# Altium PCB LED DRIVER BOARD-PCB.PcbDoc
Units mil, origin at the board's own origin, x right, y up, seen from the top; angles counter-clockwise.
Board outline 2595.31 x 1299.21 mil, 2 copper layers (Top, Bottom), stack 12.7 mil thick; 22 components, 7 nets, 43 pads, 9 vias.
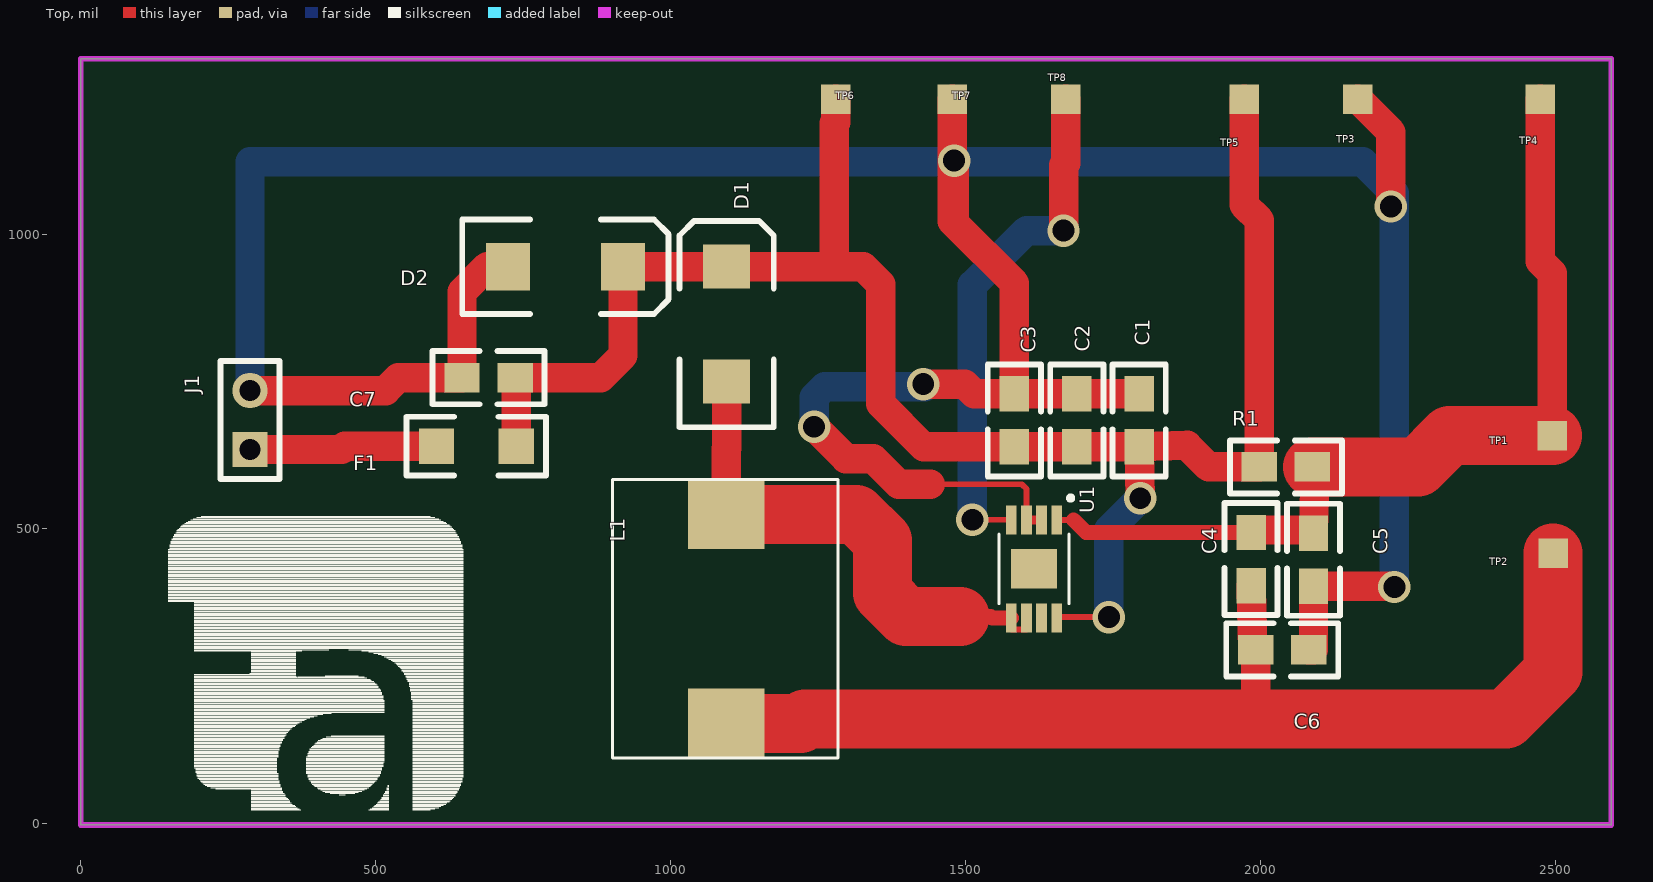
[diagram p0: Top view]
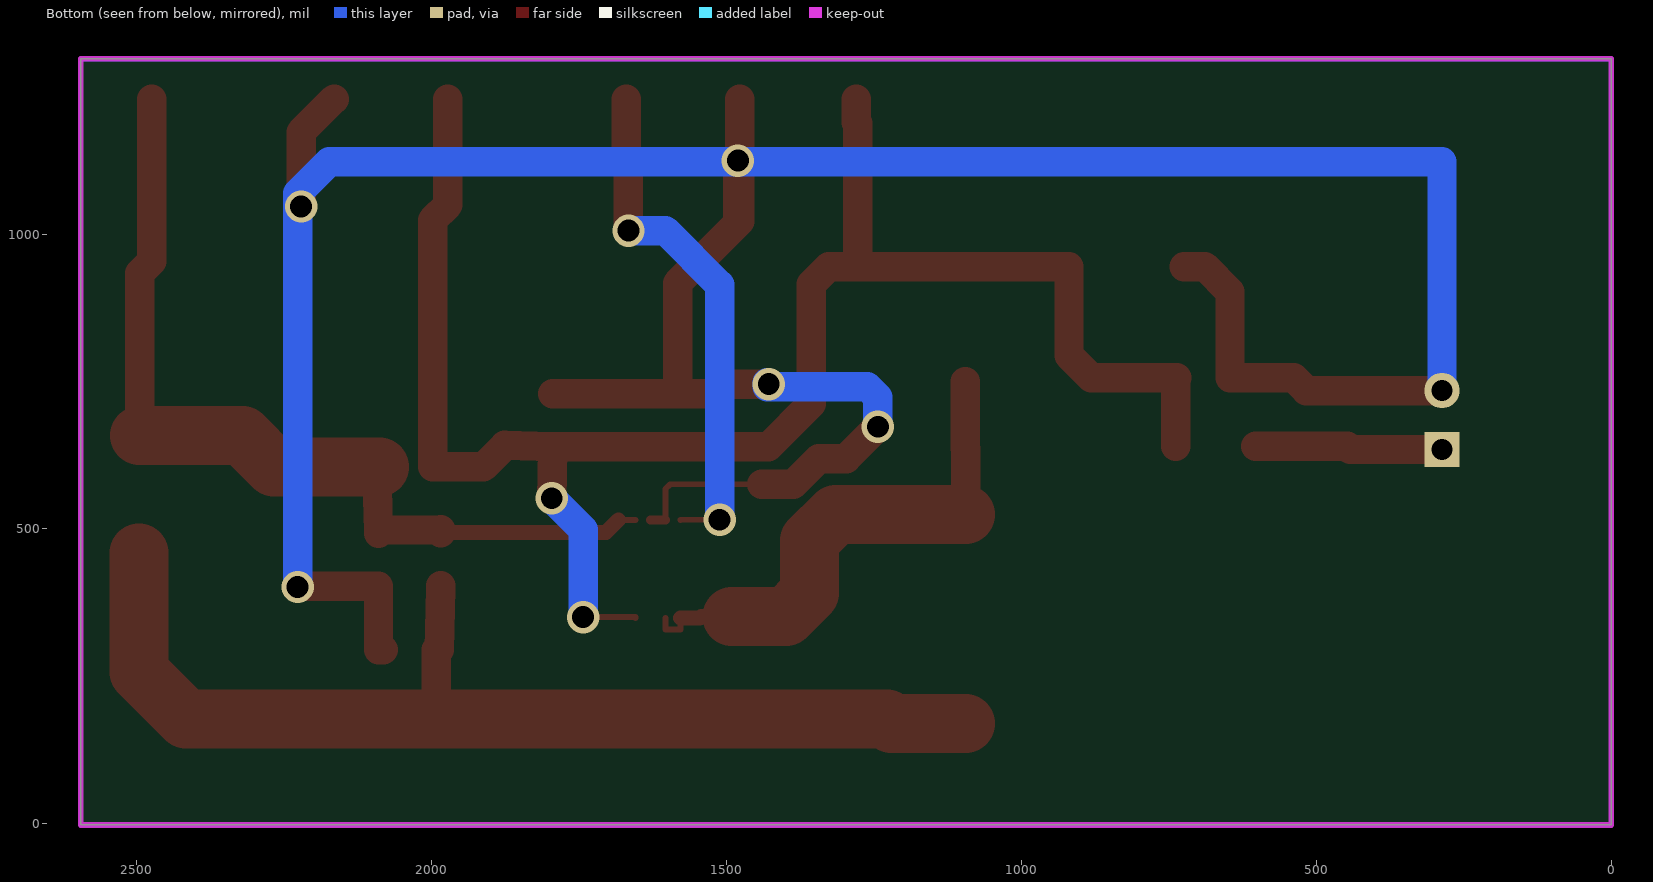
[diagram p1: Bottom view, seen from below]

## Layer stack, top to bottom
Solder Mask Top: solder mask 0.4, Solder Resist, Dk 3.5
Top: signal copper 1.35
Dielectric 1: dielectric 10, FR-4, Dk 4.3
Bottom: signal copper 1.35
Solder Mask Bottom: solder mask 0.4, Solder Resist, Dk 3.5

## Board outline
-0.3,1297.4 2595.01,1297.4 2595.01,-1.81 -0.3,-1.81

## Design rules (kind name [scope] priority, off if disabled: settings)
Clearance "Clearance - Default - DEFAULT- SMD" [IsVia vs IsSMTPin] p1: gap=10 ignorepadtopadclearanceinfootprint=FALSE
Clearance "Clearance - Default - DEFAULT - Via" [IsVia vs IsVia] p2: gap=10 ignorepadtopadclearanceinfootprint=FALSE
Clearance "Clearance - Default - DEFAULT - Net" [All] p3: gap=10 ignorepadtopadclearanceinfootprint=FALSE except(0: Arc-Hole Track-Hole SMDPad-Hole THPad-Hole Via-Hole Fill-Hole Poly-Hole Region-Hole Text-Hole)
ComponentClearance "ComponentClearance - Default - DEFAULT" [All] p1: gap=10 collisioncheckmode=3 verticalgap=10 showdistances=FALSE
FanoutControl Fanout_Small [(CompPinCount < 5)] p3: bgadir=Out bgaviamode=Centered fanoutstyle=Auto fanoutdirection=OutThenIn viagrid=1 // Fanout_Small (Default Rule)
FanoutControl Fanout_SOIC [IsSOIC] p4: bgadir=Out bgaviamode=Centered fanoutstyle=Auto fanoutdirection=Alternating viagrid=1 // Fanout_SOIC (Default Rule)
HoleToHoleClearance "HoleToHoleClearance - Default - DEFAULT" [All] p1: gap=10 allowstackedmicrovias=TRUE
Length "Default Length" [All] p1: maxlimit=50000 minlimit=0
MaxMinImpedance "Default Impedance" [All] p1: minimum=50.00 maximum=150.0
ParallelSegment "Default Parallel Segment Adjasent" [All] p1: limit=1000 gap=200
ParallelSegment "Default Parallel Segment Same Layer" [All] p2: limit=1000 gap=200
RoutingLayers "RoutingLayers - Default - DEFAULT" [All] p1: top layer_v5=TRUE bottom layer_v5=TRUE
RoutingPriority "RoutingPriority - Default - DEFAULT" [All] p1: routingpriority=3
RoutingTopology "Default Routing Topology" [All] p1: topology=Shortest
RoutingVias "RoutingVias - Default - DEFAULT" [All] p1: holewidth=37 width=55 viastyle="Through Hole" minholewidth=37 minwidth=55 maxholewidth=37 maxwidth=55
SMDToCorner "SMDToCorner - Default - DEFAULT" [All] p1: distance=100000
SolderMaskExpansion "SolderMaskExpansion from CAM settings" [All] p1: expansion=5 istentingtop=FALSE
Width "Default Width" [All] p1: maxlimit=50 minlimit=10 preferedwidth=15
20 further rules are at their usual default settings.

## Components (designator, comment, footprint, x,y, rotation, side; value= is the part's Value field where it differs from the comment)
C1 "0805" 0805 1794.6,684.2 r90 top
C2 "0805" 0805 1688.7,684.2 r90 top
C3 "0805" 0805 1582.8,684.2 r90 top
C4 "0805" 0805 1984.2,449 r270 top
C5 "0805" 0805 2090.1,447.8 r90 top
C6 "0805" 0805 2037.1,295.1 r180 top
C7 "0805" 0805 691.2,756.5 r0 top
D1 "SMB" SMB 1094.9,847.6 r90 top
D2 "SMB" SMB 821.7,944.7 r0 top
F1 "1206" 1206 670.4,640.4 r0 top
J1 "SIP-2P" SIP-2P 286.7,634.8 r90 top
L1 "MOXSPI8D28101M" MOXSPI8D28101M 1094.62,524.74 r270 top
R1 "0805" 0805 2043.3,605.3 r0 top
TP1 "SMDPAD" SMDPAD 2495.2,658.4 r0 top
TP2 "SMDPAD" SMDPAD 2496.4,458.9 r0 top
TP3 "SMDPAD" SMDPAD 2165.3,1229.1 r0 top
TP4 "SMDPAD" SMDPAD 2474.91,1229.1 r0 top
TP5 "SMDPAD" SMDPAD 1972.28,1229.1 r0 top
TP6 "SMDPAD" SMDPAD 1279.9,1229.1 r0 top
TP7 "SMDPAD" SMDPAD 1477.8,1229.1 r0 top
TP8 "SMDPAD" SMDPAD 1669.7,1229.1 r0 top
U1 "AL8861MP-13" AL8861MP-13 1616.2,432.3 r270 top

## Footprints (in the part's own frame and the unit in brackets; to place one, negate y for a bottom-side part, rotate by r counter-clockwise, add the part's x,y. Pads: shape width x height; smd on the part's side, far side on the other; paste and mask are expansions set on the pad)
0805 [mil]
  rect 60x50 smd: 1(-45,0) 2(45,0)
  silkscreen extent -95,-45 95,45
1206 [mil]
  rect 60x60 smd: 1(-67.5,0) 2(67.5,0)
  silkscreen extent -118,-50 118,50
AL8861MP-13 [mm]
  rect 1.25x0.46 smd: 1(-2.11,0.975) 2(-2.11,0.325) 3(-2.11,-0.325) 4(-2.11,-0.975) 5(2.11,-0.975) 6(2.11,-0.325) 7(2.11,0.325) 8(2.11,0.975)
  rect 1.7x2 smd: 9(0,0)
  silkscreen extent -3.15,-1.5 1.5,1.68
MOXSPI8D28101M [mm]
  rect 3x3.3 smd: 1(0,0) 2(9,0)
  silkscreen extent -1.5,-4.9 10.5,4.8
SIP-2P [mil]
  rect 60x60 / inner round 60 / far side rect 60x60 hole 35: 1(0,0)
  round 60 hole 35: 2(100,0)
  silkscreen extent -50,-50 150,50
SMB [mil]
  rect 75x80 smd: 1(97.5,0) 2(-97.5,0)
  silkscreen extent -175,-80 175,80
SMDPAD [mil]
  rect 50x50 smd: 1(0,0)

## Via types
v1: diameter 55, hole 37, Top to Bottom, 9 vias

## Nets (pads, with @x,y where several pads share a name; then routed paths per layer and width w, separated by ;. In a path a pad name is that pad's centre, name@x,y a point inside that pad or via, vN(x,y) a via of type N, cw(c..) or ccw(c..) an arc to the next point about the centre after c; other vN are vias at no path point)
12V: C1.1 C2.1 C3.1 C7.2 D1.1 D2.1 F1.2 R1.1 TP5.1 TP6.1 U1.8 | length 3127.1
  Top w10: U1.8 1654.59,350.6 v1(1743.1,350.6)
  Top w50: F1.2 737.9,756.5 C7.2 881.5,756.5 919.2,794.2 D2.1 919.2,945.1 D1.1 1277.8,945.1 ; TP6.1 1279.9,1190 1277.8,1187.9 1277.8,945.1 ; v1(1796.3,552) 1794.6,634.2 C1.1 ; TP5.1 1972.28,1049.57 1998.3,1023.55 R1.1 1912.2,605.3 1875.8,641.7 C1.1 ; 1277.8,945.1 1326.2,945.1 1356.3,915 1356.3,712.1 1429.2,639.2 C3.1 C2.1 C1.1
  Bottom w50: v1(1743.1,350.6) 1743.1,498.8 v1(1796.3,552)
ANODE: C4.1 C5.2 R1.2 TP1.1 TP4.1 U1.1 | length 1574.9
  Top w10: U1.1 1683.13,515.37
  Top w25: 1683.13,515.37 1704.5,494 C4.1
  Top w50: C4.1 1984.2,499 C5.2@2090.1,497.8 ; R1.2 2093.3,605.3 C5.2@2090.1,497.8 ; C5.2 C5.2@2090.1,497.8 ; TP4.1 2474.91,953.9 2495.2,933.6 TP1.1
  Top w100: R1.2 2267.7,605.3 2320.8,658.4 TP1.1
CATHODE: C4.2 C6.2 L1.2 TP2.1 | length 1881.1
  Top w50: 1966.1,177.9 1992.1,203.9 C6.2 1987.1,295.1 1984.2,399 C4.2
  Top w100: L1.2 1220.58,170.41 1228.07,177.9 1966.1,177.9 2416.6,177.9 2496.4,257.7 TP2.1
GND: C1.2 C2.2 C3.2 C5.1 C6.1 C7.1 D2.2 J1.2 TP3.1 TP7.1 U1.2 U1.3 | length 5858.6
  Top w10: 1440.1,575.8 1595.6,575.8 1603.4,568 U1.3
  Top w15: U1.3 U1.2
  Top w50: J1.2 516.6,734.8 538.3,756.5 C7.1 646.2,901.9 689,944.7 D2.2 ; v1(1243.3,673.5) 1297.3,619.5 1343.3,619.5 1387,575.8 1440.1,575.8 ; v1(1428.2,745.7) 1498.5,745.7 1515,729.2 C3.2 ; TP7.1 1477.8,1021.9 1480.6,1019.1 ; v1(1480.6,1124.8) 1480.6,1019.1 ; C1.2 C2.2 C3.2 ; C6.1 2090.1,295.1 C5.1 2227.2,402.8 v1(2227.2,401.6) ; TP3.1 2221.3,1173.1 v1(2221.3,1046.9) ; 1480.6,1019.1 1582.8,916.9 C3.2
  Bottom w15: v1(2227.2,401.6) v1@2227.2,404.4
  Bottom w50: J1.2 286.7,1123 v1@1482.4,1123 ; v1(1243.3,673.5) 1243.3,723.3 1261.2,741.2 1430.9,741.2 1430.9,748.4 v1(1428.2,745.7) ; v1(1480.6,1124.8) v1@1482.4,1123 ; v1@2227.2,404.4 2227.2,1046.9 v1(2221.3,1046.9) 2227.2,1052.8 2227.2,1069.1 2173.3,1123 v1@1482.4,1123
N00085: D1.2 L1.1 U1.5 U1.6 | length 898.4
  Top w10: U1.5 1577.81,329.62 1603.4,329.62 U1.6
  Top w25: 1491.1,351.5 1542.99,351.5 1545.26,349.23 U1.5
  Top w50: L1.1 1094.62,636.22 1094.9,636.5 D1.2
  Top w100: L1.1 1314.76,524.74 1359,480.5 1359,391.3 1398.8,351.5 1491.1,351.5
N03589: F1.1 J1.1 | length 318.5
  Top w50: J1.1 442,634.8 447.6,640.4 F1.1
VSET: TP8.1 U1.4 | length 881.7
  Top w10: v1(1511.8,515.7) 1577.81,515.7 U1.4
  Top w50: v1(1666.2,1006) 1666.2,1117.1 1669.7,1120.6 TP8.1
  Bottom w50: v1(1511.8,515.7) 1511.8,914 1603.8,1006 v1(1666.2,1006)
pads on no net: U1.7 U1.9

## Polygon pours and split planes (outlines as drawn)
GND on Bottom (solid, remove dead copper, pour order 0): 1.9,1293 2596.4,1293 2596.4,-4.1 1.9,-4.1

## Keep-outs
Keep-Out Layer:
  the board outline again, w10

## Silkscreen, mask and mechanical layers (free items; w line width, h text height)
Silkscreen Top:
  drawing of 462 lines, arcs and shapes, not listed
Drill Drawing:
  lines w1: -3.5,742.7 -3.47,742.7 ; 1420.2,1295.2 1420.23,1295.2 ; 1436,-5.4 1436.03,-5.4 ; 2594.6,613.3 2594.63,613.3
  lines w10: -3.5,792.7 -3.5,1941.8 ; 1112.14,1891.8 -3.5,1891.8 ; 1470.2,1295.2 3241.2,1295.2 ; 1478.96,1891.8 2594.6,1891.8 ; 1486,-5.4 3241.2,-5.4 ; 2594.6,663.3 2594.6,1941.8 ; 3191.2,577.4 3191.2,-5.4 ; 3191.2,712.4 3191.2,1295.2 ; -3.5,1891.8 96.5,1866.8 96.5,1916.8 -3.5,1891.8 ; 2594.6,1891.8 2494.6,1916.8 2494.6,1866.8 2594.6,1891.8 ; 3191.2,-5.4 3216.2,94.6 3166.2,94.6 3191.2,-5.4 ; 3191.2,1295.2 3166.2,1195.2 3216.2,1195.2 3191.2,1295.2
  text "66.0mm" at 1142.14,1854.3 h50
  text "33.0mm" at 3035.52,607.4 h50